# EAGLE board TR808_Project-1 (EAGLE 9.6.2)
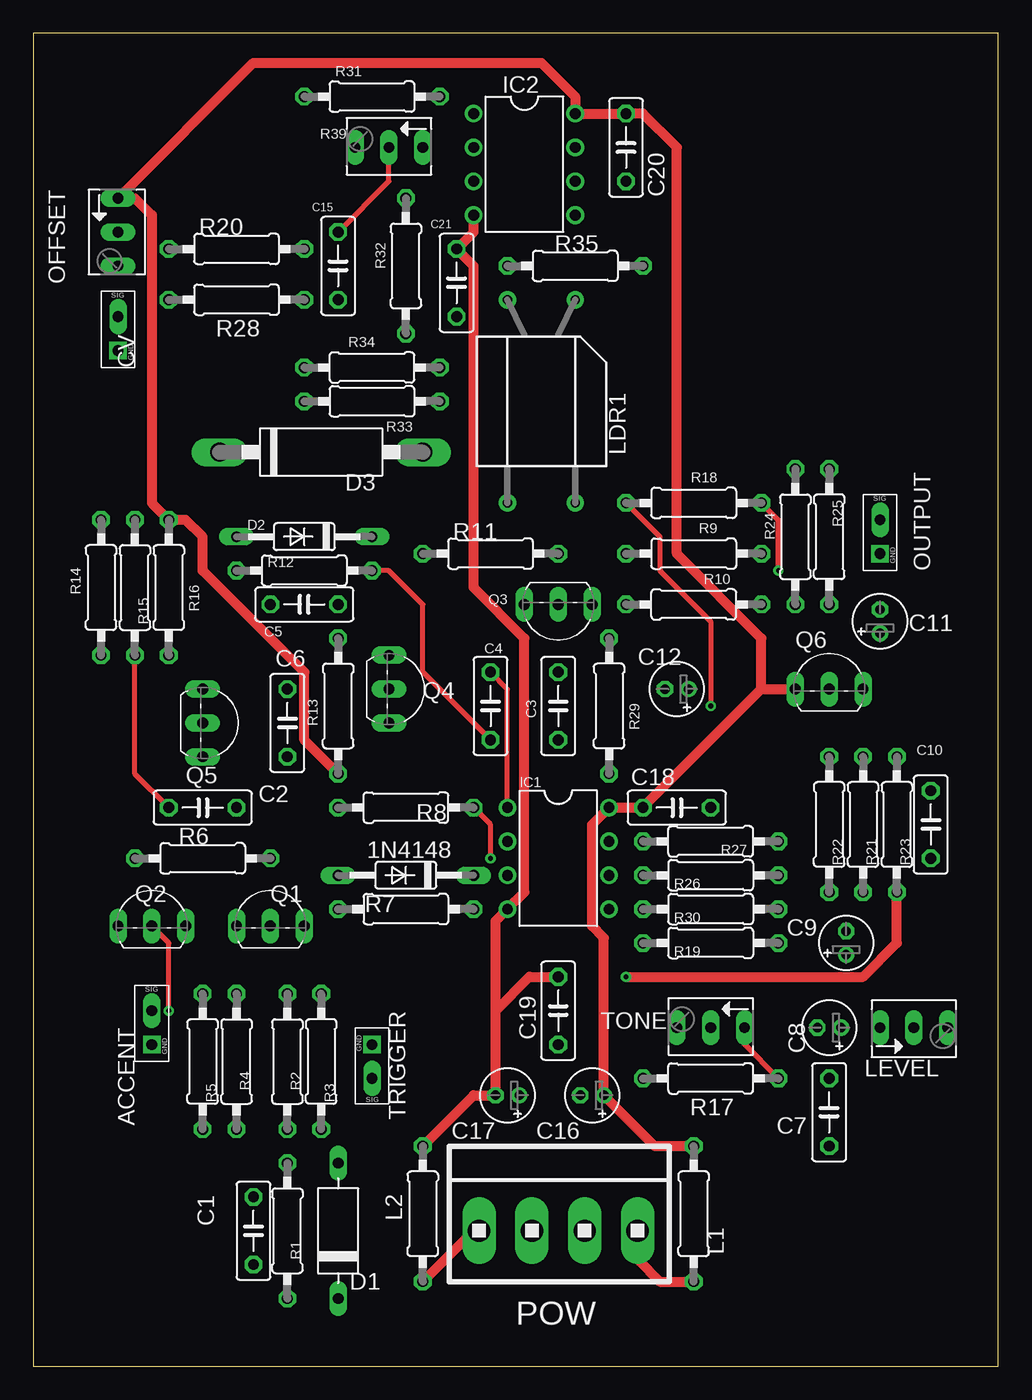
[diagram p0: board, top side]
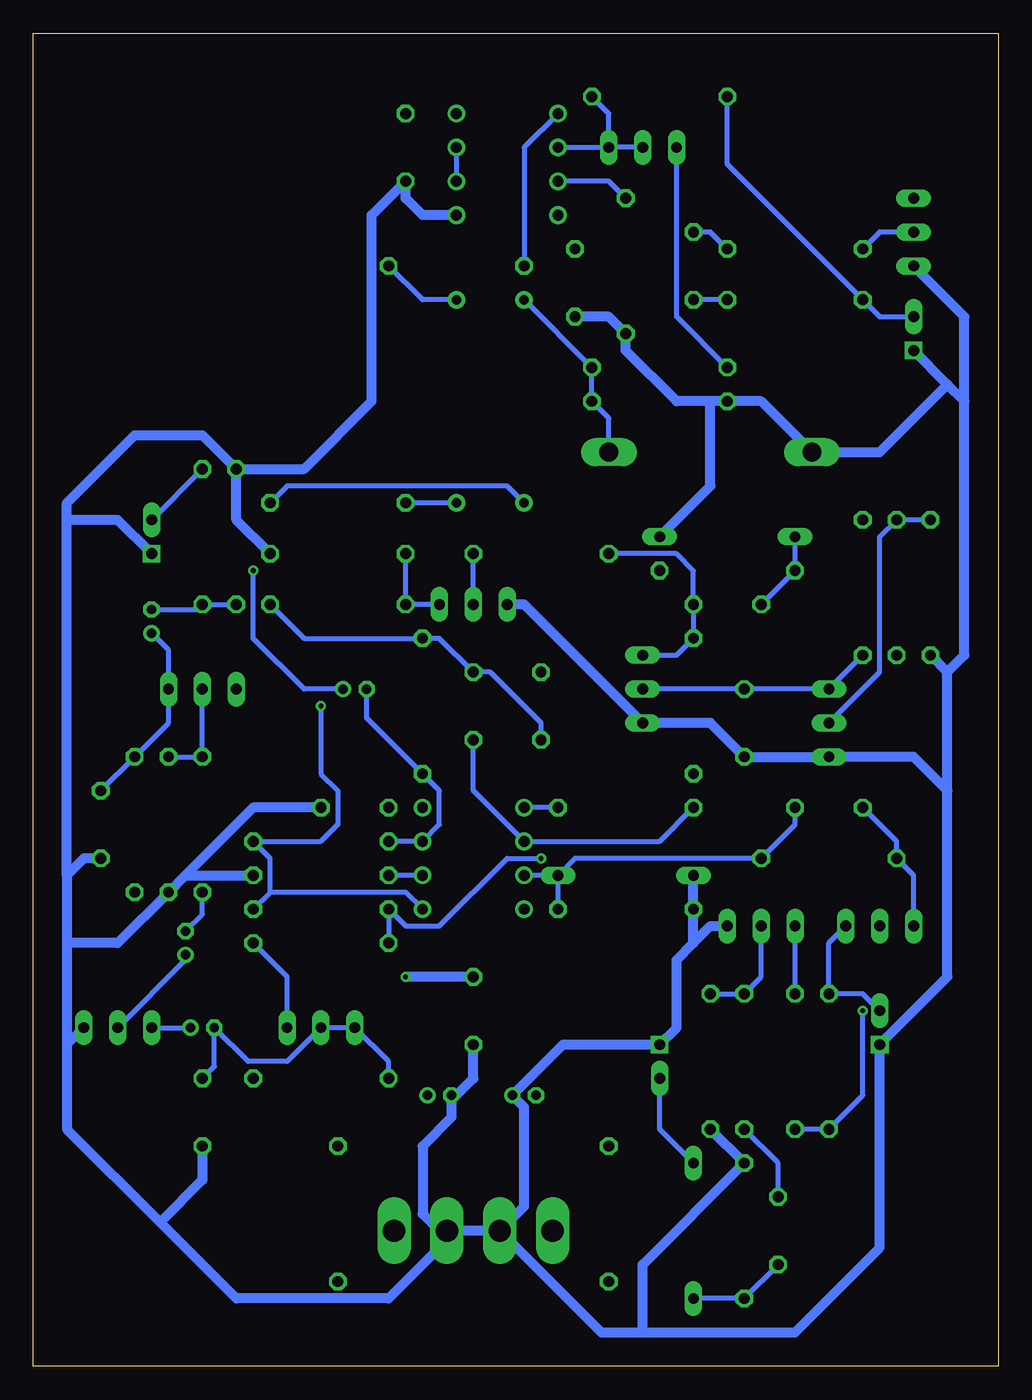
[diagram p1: board, bottom side, seen from below]

Size 72.37 x 100 mm. Coordinates in mm from the lower left corner, seen from the top.
Outline: 0,0 72.37,0 72.37,100 0,100 0,0
Copper layers (1*16): Top 0.035mm / dielectric 1.5mm / Bottom 0.035mm
Design rules "default": minimum track width 6mil, minimum drill 0.35mm, track to track 6mil, track to pad 6mil, pad to pad 6mil, via to via 6mil, smd to smd 6mil, copper to edge 40mil, drill to drill 6mil, minimum pad ring 10mil, minimum via ring 8mil, stop-mask expansion 4mil, vias tented up to drill 0mil, thermal gap 10mil

## Footprints (pad centres in the part's own frame; a part is rotated, then mirrored left to right if it is on the bottom)
DO35-10 = drill 0.813 long: A 5.08,0; C -5.08,0
OFFBOARD2JACKALT = drill 0.813 square: GND -1.27,-1.27 | drill 0.813 long: SIGNAL -1.27,1.27
C050-025X075 = drill 0.813 octagon: 1 -2.54,0; 2 2.54,0
E1,8-4 = drill 0.711 pad 1.168: + -0.889,0 | drill 0.711 pad 1.168 octagon: - 0.889,0
D-10 = drill 0.813 long: A 5.08,0; C -5.08,0
C1702-15 = drill 1.397 long: A 7.62,0; C -7.62,0
DIL08 = drill 0.813 pad 1.27: 1 -3.81,-3.81; 2 -1.27,-3.81; 3 1.27,-3.81; 4 3.81,-3.81; 5 3.81,3.81; 6 1.27,3.81; 7 -1.27,3.81; 8 -3.81,3.81
0207/10 = drill 0.813 octagon: 1 -5.08,0; 2 5.08,0
VTL5C = drill 0.7 pad 1.3: 1 -7.62,2.54; 2 -7.62,-2.54; 3 7.62,2.54; 4 7.62,-2.54
B64Y = drill 0.813 long: A 2.54,0; E -2.54,0; S 0,0
1X4MTA = drill 1.676 long: 1 5.944,0; 2 1.981,0; 3 -1.981,0; 4 -5.944,0
TO92-EBC = drill 0.813 long: B 0,-1.27; C -2.54,-1.27; E 2.54,-1.27

## Placement (x,y rotation side)
1N4148  1N4148  [DO35-10]  27.94,36.83 180 top
ACCENT  OFFBOARD2JACKALT_AARON  [OFFBOARD2JACKALT]  10.16,25.4 0 top
C1  0u1  [C050-025X075]  16.51,10.16 90 top
C2  15n  [C050-025X075]  12.7,41.91 0 top
C3  15n  [C050-025X075]  39.37,49.53 90 top
C4  15n  [C050-025X075]  34.29,49.53 90 top
C5  33n  [C050-025X075]  20.32,57.15 180 top
C6  100n  [C050-025X075]  19.05,48.26 90 top
C7  100n  [C050-025X075]  59.69,19.05 90 top
C8  0.47/50  [E1,8-4]  59.69,25.4 180 top
C9  0.47/50  [E1,8-4]  60.96,31.75 90 top
C10  220p  [C050-025X075]  67.31,40.64 90 top
C11  1/50  [E1,8-4]  63.5,55.88 90 top
C12  33/6.3  [E1,8-4]  48.26,50.8 180 top
C15  .002  [C050-025X075]  22.86,82.55 90 top
C16  10u  [E1,8-4]  41.91,20.32 180 top
C17  10u  [E1,8-4]  35.56,20.32 180 top
C18  0u1  [C050-025X075]  48.26,41.91 0 top
C19  0u1  [C050-025X075]  39.37,26.67 90 top
C20  0u1  [C050-025X075]  44.45,91.44 270 top
C21  0u1  [C050-025X075]  31.75,81.28 90 top
CV  OFFBOARD2JACKALT_AARON  [OFFBOARD2JACKALT]  7.62,77.47 0 top
D1  1N9149  [D-10]  22.86,10.16 90 top
D2  1N4148  [DO35-10]  20.32,62.23 180 top
D3  1N5228  [C1702-15]  21.59,68.58 0 top
IC1  TL072P  [DIL08]  39.37,38.1 270 top
IC2  TL072P  [DIL08]  36.83,90.17 270 top
L1  [0207/10]  49.53,11.43 90 top
L2  [0207/10]  29.21,11.43 90 top
LDR1  VTL5C3  [VTL5C]  38.1,72.39 270 top
LEVEL  10k  [B64Y]  66.04,25.4 0 top
OFFSET  10k  [B64Y]  6.35,85.09 270 top
OUTPUT  OFFBOARD2JACKALT_AARON  [OFFBOARD2JACKALT]  64.77,62.23 0 top
POW  [1X4MTA]  39.37,10.16 0 top
Q1  BC546A  [TO92-EBC]  17.78,34.29 0 top
Q2  BC556  [TO92-EBC]  8.89,34.29 0 top
Q3  BC546A  [TO92-EBC]  39.37,55.88 180 top
Q4  BC546A  [TO92-EBC]  27.94,50.8 270 top
Q5  BC546A  [TO92-EBC]  13.97,48.26 270 top
Q6  BC546A  [TO92-EBC]  59.69,52.07 0 top
R1  100k  [0207/10]  19.05,10.16 270 top
R2  22K  [0207/10]  19.05,22.86 270 top
R3  10K  [0207/10]  21.59,22.86 90 top
R4  10K  [0207/10]  15.24,22.86 270 top
R5  4K7  [0207/10]  12.7,22.86 90 top
R6  100k  [0207/10]  12.7,38.1 180 top
R7  4k7  [0207/10]  27.94,34.29 180 top
R8  1M  [0207/10]  27.94,41.91 0 top
R9  47K  [0207/10]  49.53,60.96 180 top
R10  6K8  [0207/10]  49.53,57.15 0 top
R11  100K  [0207/10]  34.29,60.96 180 top
R12  1M  [0207/10]  20.32,59.69 180 top
R13  22k  [0207/10]  22.86,49.53 270 top
R14  2k7  [0207/10]  5.08,58.42 90 top
R15  8k2  [0207/10]  7.62,58.42 270 top
R16  1M  [0207/10]  10.16,58.42 90 top
R17  10k  [0207/10]  50.8,21.59 0 top
R18  500k  [0207/10]  49.53,64.77 180 top
R19  220R  [0207/10]  50.8,31.75 180 top
R20  150k  [0207/10]  15.24,83.82 180 top
R21  82k  [0207/10]  59.69,40.64 90 top
R22  100k  [0207/10]  62.23,40.64 90 top
R23  6k8  [0207/10]  64.77,40.64 90 top
R24  100k  [0207/10]  57.15,62.23 270 top
R25  1K  [0207/10]  59.69,62.23 90 top
R26  22k  [0207/10]  50.8,36.83 180 top
R27  47k  [0207/10]  50.8,39.37 0 top
R28  470k  [0207/10]  15.24,80.01 180 top
R29  470k  [0207/10]  43.18,49.53 90 top
R30  47k  [0207/10]  50.8,34.29 180 top
R31  100k  [0207/10]  25.4,95.25 180 top
R32  10k  [0207/10]  27.94,82.55 270 top
R33  4k7  [0207/10]  25.4,72.39 180 top
R34  33k  [0207/10]  25.4,74.93 0 top
R35  470R  [0207/10]  40.64,82.55 180 top
R39  20k  [B64Y]  26.67,91.44 180 top
TONE  10k  [B64Y]  50.8,25.4 180 top
TRIGGER  OFFBOARD2JACKALT_AARON  [OFFBOARD2JACKALT]  24.13,22.86 180 top

## Library data of the parts
1N4148 D1-D3 = diode
ACCENT CV OUTPUT TRIGGER = aaronlibrary
C1-C12 C15-C21 = rcl; SPICEPREFIX: C
IC1 IC2 = linear
L1 L2 = rcl; SPICEPREFIX: L
LDR1 = optocoupler; MF: VACTEC PHOTO; MPN: VTL5C9; OC_FARNELL: 2067857; OC_NEWARK: 95F9033
LEVEL OFFSET R39 TONE = pot
POW = con-amp
Q1 Q3-Q6 = transistor-npn
Q2 = transistor-pnp
R1-R35 = rcl; SPICEPREFIX: R

## Nets
D1: C1.1 D1.C R1.2
GND: 1N4148.A ACCENT.GND C6.1 C7.1 C10.1 C16.- C17.+ C18.2 C19.1 C20.2 C21.1 CV.GND D2.C D3.C IC2.5 LEVEL.A OFFSET.A OUTPUT.GND POW.2 POW.3 Q1.E Q3.E Q4.E Q5.E R1.1 R3.1 R7.2 R9.1 R14.1 R22.1 R24.1 R26.1 R32.2 R33.2 TRIGGER.GND
N$1: C12.+ LDR1.4 R18.1
N$2: C1.2 R2.2
N$3: Q1.B R2.1 R3.2
N$4: Q1.C R4.1
N$5: Q2.B R4.2 R5.1
N$6: ACCENT.SIGNAL Q2.E R5.2
N$7: D1.A TRIGGER.SIGNAL
N$8: C2.1 Q2.C R6.2 R15.2
N$9: 1N4148.C C2.2 IC1.3 R6.1 R7.1
N$10: Q3.B R11.1
N$11: C4.2 IC1.1 R8.2 R19.2 R30.2
N$12: Q3.C R9.2 R10.1
N$13: C3.2 C4.1 R10.2 R12.1 R29.2
N$14: C15.2 IC2.2 R20.1 R31.1 R39.E R39.S
N$15: C5.2 D2.A R12.2
N$16: C5.1 Q4.C R11.2 R13.1
N$17: Q5.B R14.2 R15.1
N$18: C6.2 Q4.B Q5.C R16.1
N$19: R17.2 R19.1 TONE.E
N$20: C8.+ LEVEL.E
N$21: C9.+ LEVEL.S
N$22: C9.- R21.1
N$23: Q6.B R21.2 R22.2
N$24: C10.2 C11.+ Q6.E R23.2
N$25: C11.- R24.2 R25.1
N$26: OUTPUT.SIGNAL R25.2
N$27: IC1.6 R26.2
N$28: IC1.5 LDR1.3 R18.2 R27.2 R30.1
N$29: C12.- IC1.7 R27.1 R29.1
N$30: C15.1 R28.1
N$31: C7.2 C8.- R17.1 TONE.A TONE.S
N$32: IC2.3 R32.1
N$33: OFFSET.S R20.2
N$34: IC2.1 R35.2
N$35: R34.1 R39.A
N$36: IC2.6 IC2.7
N$37: LDR1.1 R35.1
N$38: D3.A LDR1.2 R33.1 R34.2
N$39: CV.SIGNAL R28.2 R31.2
N$40: C3.1 IC1.2 R8.1
N$41: L1.1 POW.1
N$42: L2.1 POW.4
V+: C16.+ C18.1 C20.1 IC1.8 IC2.8 L1.2 OFFSET.E Q6.C R13.2 R16.2
V-: C17.- C19.2 C21.2 IC1.4 IC2.4 L2.2 R23.1

## Tracks (layer width: path | path; a pad name or v marks a point on that pad's centre or on a via)
D1
  Bottom 0.381: C1.1 R1.2 D1.C
GND
  Bottom 0.762: IC2.5 43.18,86.36 44.45,87.63 C20.2 46.99,86.36 46.99,72.39 52.07,67.31 R24.1 | C21.1 29.21,78.74 R32.2 27.94,76.2 24.13,72.39 21.59,72.39 | 21.59,72.39 R33.2 17.78,72.39 D3.C 8.89,68.58 3.81,73.66 | POW.3 POW.2 | POW.2 41.91,10.16 43.18,11.43 43.18,16.51 41.02,18.67 C16.- 40.64,20.32 39.37,21.59 C19.1 | POW.3 35.56,11.99 35.56,19.43 C17.+ 32.64,24.13 TRIGGER.GND 24.13,25.4 24.13,30.48 22.86,31.75 | POW.2 41.35,9.45 45.72,5.08 57.15,5.08 62.87,10.79 | C7.1 59.69,13.97 62.87,10.79 | 69.85,31.75 66.04,31.75 R22.1 60.96,36.83 | R9.1 57.15,63.5 R24.1 | 22.86,31.75 21.59,33.02 Q1.E | 22.86,31.75 R7.2 1N4148.A | POW.3 29.77,2.54 26.67,2.54 | 26.67,2.54 15.24,2.54 8.89,8.89 ACCENT.GND 3.81,29.21 3.81,43.18 | R3.1 R1.1 26.67,7.62 26.67,2.54 | Q3.E 35.56,57.15 Q4.E 21.59,48.26 C6.1 Q5.E 6.35,45.72 3.81,43.18 | 60.96,36.83 R26.1 | 3.81,43.18 3.81,52.07 | 3.81,52.07 R14.1 | 3.81,52.07 2.54,53.34 2.54,72.39 | 2.54,72.39 3.81,73.66 | 3.81,73.66 CV.GND | 2.54,72.39 2.54,78.74 OFFSET.A | D2.C 21.59,66.04 21.59,72.39 | 69.85,36.83 69.85,31.75 | C10.1 68.58,38.1 69.85,36.83 | 69.85,36.83 69.85,63.5 | 69.85,63.5 69.85,64.77 64.77,69.85 59.69,69.85 R24.1 | OUTPUT.GND 66.04,63.5 69.85,63.5 | 62.87,10.79 69.85,17.78 69.85,24.13 | 69.85,31.75 69.85,24.13 | LEVEL.A 69.85,24.13 | C18.2 55.88,41.91 60.96,36.83
N$1  (via drill 0.35)
  Top 0.381: v55.88,59.69 55.88,63.5 R18.1
  Bottom 0.381: LDR1.4 36.83,66.04 53.34,66.04 R18.1 | C12.+ 52.07,50.8 55.88,54.61 v55.88,59.69
N$2
  Bottom 0.381: C1.2 16.51,15.24 R2.2
N$3
  Bottom 0.381: Q1.B 17.78,29.21 R2.1 R3.2
N$4
  Bottom 0.381: R4.1 Q1.C
N$5  (via drill 0.35)
  Top 0.381: Q2.B 10.16,31.75 v10.16,26.67
  Bottom 0.381: R4.2 R5.1 10.16,20.32 v10.16,26.67
N$6
  Bottom 0.381: ACCENT.SIGNAL 10.16,27.94 R5.2 12.7,31.75 Q2.E
N$7
  Bottom 0.381: D1.A 25.4,17.78 TRIGGER.SIGNAL
N$8
  Top 0.381: C2.1 7.62,44.45 R15.2
  Bottom 0.381: Q2.C 6.35,36.83 R6.2 7.62,39.37 C2.1
N$9
  Bottom 0.381: 1N4148.C IC1.3 | R7.1 1N4148.C | C2.2 15.24,40.64 R6.1 31.75,38.1 1N4148.C
N$10
  Bottom 0.381: Q3.B R11.1
N$11  (via drill 0.35)
  Top 0.381: v34.29,38.1 34.29,40.64 R8.2 | IC1.1 35.56,50.8 C4.2
  Bottom 0.381: R19.2 R30.2 44.45,33.02 41.91,33.02 36.83,38.1 v34.29,38.1 | R8.2 IC1.1
N$12
  Bottom 0.381: Q3.C R10.1 R9.2
N$13
  Top 0.381: C4.1 29.21,52.07 29.21,57.15 26.67,59.69 R12.1
  Bottom 0.381: R10.2 52.07,54.61 R29.2 41.91,54.61 C3.2 38.1,52.07 34.29,48.26 C4.1
N$14
  Top 0.381: C15.2 26.67,88.9 R39.S
  Bottom 0.381: R20.1 21.59,85.09 C15.2 | R39.S R39.E | R39.E 29.21,93.98 R31.1 | IC2.2 R39.E
N$15
  Bottom 0.381: C5.2 R12.2 D2.A
N$16
  Bottom 0.381: Q4.C 24.13,53.34 R13.1 C5.1 22.86,59.69 24.13,60.96 R11.2
N$17
  Bottom 0.381: R14.2 R15.1 8.89,62.23 8.89,52.07 Q5.B
N$18
  Bottom 0.381: R16.1 Q5.C C6.2 Q4.B
N$19
  Top 0.381: R17.2 53.34,24.13 TONE.E
  Bottom 0.381: TONE.E 53.34,29.21 R19.1
N$20
  Bottom 0.381: LEVEL.E C8.+
N$21
  Bottom 0.381: LEVEL.S 60.96,30.48 C9.+
N$22
  Bottom 0.381: C9.- 59.69,33.91 R21.1
N$23
  Bottom 0.381: Q6.B R21.2 R22.2
N$24
  Bottom 0.381: C10.2 R23.2 62.23,48.26 Q6.E 62.23,53.72 C11.+
N$25
  Bottom 0.381: C11.- 60.07,56.77 R25.1 R24.2
N$26
  Bottom 0.381: OUTPUT.SIGNAL R25.2
N$27
  Bottom 0.381: IC1.6 R26.2
N$28  (via drill 0.35)
  Top 0.381: R18.2 46.99,62.23 46.99,59.69 50.8,55.88 v50.8,49.53
  Bottom 0.381: R30.1 54.61,35.56 | IC1.5 44.45,35.56 54.61,35.56 | 54.61,35.56 54.61,38.1 R27.2 50.8,39.37 49.53,40.64 49.53,43.18 50.8,44.45 v50.8,49.53 | LDR1.3 R18.2
N$29
  Bottom 0.381: R27.1 IC1.7 41.91,40.64 41.91,43.18 R29.1 47.37,48.64 C12.-
N$30
  Bottom 0.381: R28.1 C15.1
N$31
  Bottom 0.381: R17.1 45.72,22.86 TONE.A TONE.S 53.34,22.86 56.26,22.86 C8.- 58.8,22.48 C7.2
N$32
  Bottom 0.381: R32.1 29.21,88.9 IC2.3
N$33
  Bottom 0.381: OFFSET.S 8.89,85.09 R20.2
N$34
  Bottom 0.381: IC2.1 35.56,91.44 R35.2
N$35
  Bottom 0.381: R34.1 24.13,78.74 R39.A
N$36
  Bottom 0.381: IC2.7 IC2.6
N$37
  Bottom 0.381: LDR1.1 43.18,80.01 R35.1
N$38
  Bottom 0.381: D3.A 29.21,71.12 R33.1 R34.2 LDR1.2
N$39
  Bottom 0.381: R31.2 20.32,90.17 R28.2 8.89,78.74 CV.SIGNAL
N$40
  Bottom 0.381: C3.1 39.37,43.18 IC1.2 25.4,39.37 R8.1
N$41
  Top 0.762: POW.1 45.31,8.03 46.99,6.35 L1.1
N$42
  Top 0.762: L2.1 33.02,10.16 POW.4
V+
  Top 0.762: L1.2 46.61,16.51 C16.+ 42.8,32.13 41.91,33.02 41.91,40.64 IC1.8 C18.1 54.61,50.8 | 54.61,50.8 Q6.C | 54.61,50.8 54.61,54.61 48.26,60.96 48.26,91.44 45.72,93.98 C20.1 IC2.8 40.64,95.25 38.1,97.79 16.51,97.79 OFFSET.E 7.62,87.63 8.89,86.36 8.89,64.77 R16.2 11.43,63.5 12.7,62.23 12.7,59.69 20.32,52.07 20.32,46.99 R13.2
V-  (via drill 0.35)
  Top 0.762: L2.2 33.02,20.32 C17.- 34.67,26.67 | v44.45,29.21 62.23,29.21 64.77,31.75 R23.1 | 34.67,26.67 34.67,33.4 IC1.4 36.83,35.56 36.83,54.61 33.02,58.42 33.02,82.55 C21.2 33.02,85.09 IC2.4 | 34.67,26.67 37.21,29.21 C19.2
  Bottom 0.762: C19.2 v44.45,29.21